# Altium PCB ESP32-AXIS3-6.0.PcbDoc (part 2 of 2)
Units mm, origin at the board's own origin, x right, y up, seen from the top; angles counter-clockwise.
Board outline 90.12 x 69.99 mm, 2 copper layers (TopLayer, BottomLayer); 125 components, 102 nets, 464 pads, 321 vias.
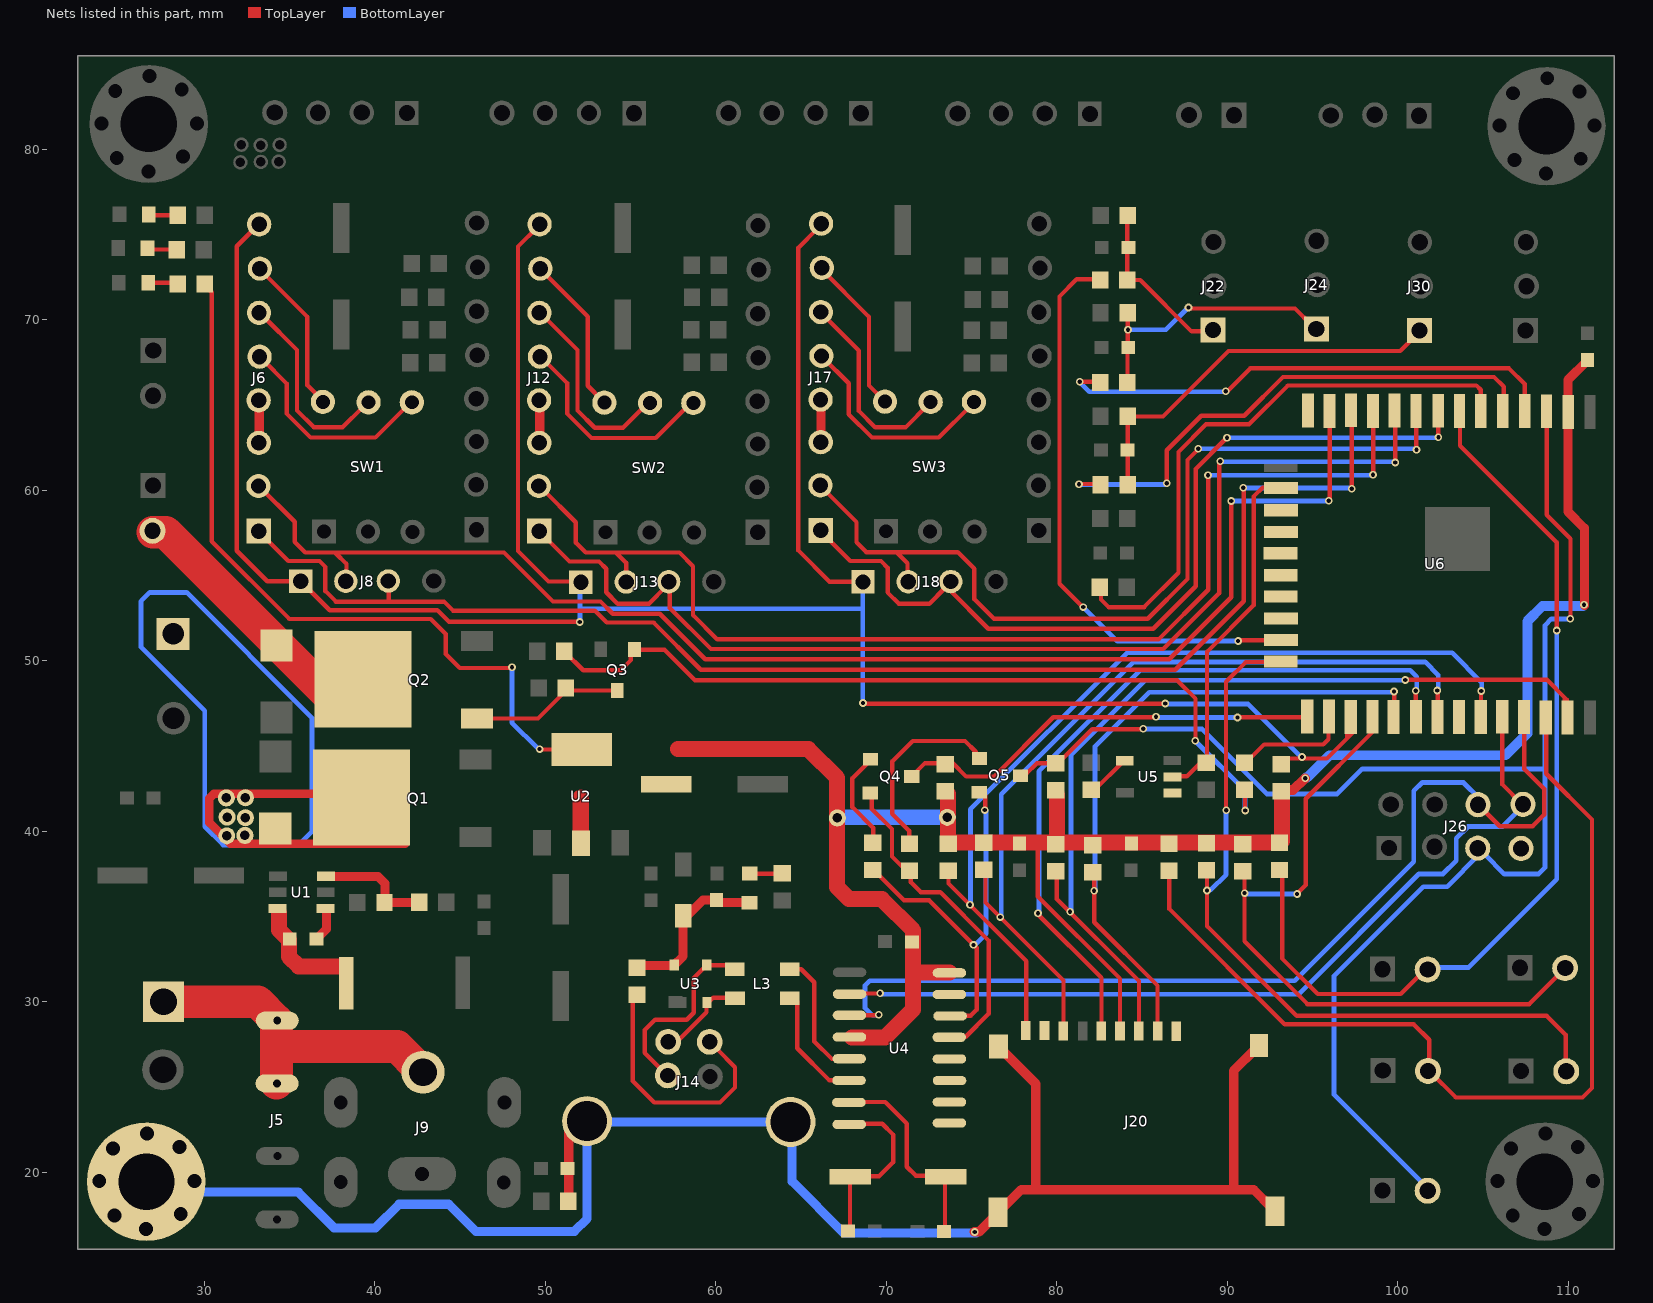
[diagram p2: the nets of this part, all layers, seen from the top]

## Via types
v1: diameter 0.45, hole 0.25, TopLayer to BottomLayer, tented both sides, 321 vias

## Nets (pads, with @x,y where several pads share a name; then routed paths per layer and width w, separated by ;. In a path a pad name is that pad's centre, name@x,y a point inside that pad or via, vN(x,y) a via of type N, cw(c..) or ccw(c..) an arc to the next point about the centre after c; other vN are vias at no path point) (continued)
UnNamedNet18: C19.1 J30.1 R33.2 R34.2 | length 22.4
  TopLayer w0.254: R33.2@84.153,60.568 R34.2@84.153,64.453 ; R34.2@84.386,64.331 86.222,64.331 90.064,68.173 100.145,68.173 J30.1@101.002,69.03
UnNamedNet19: C20.1 J24.1 R35.2 R36.2 | length 15.2
  TopLayer w0.254: R35.2@84.143,66.543 84.143,68.225 84.153,68.236 R36.2@84.153,70.067 ; v1@87.831,70.665 93.964,70.665 94.948,69.681 J24.1@95.075,69.681
  BottomLayer w0.279: v1@84.212,69.427 86.397,69.427 v1@87.662,70.691
  other v1: 84.175,69.421 87.72,70.723
UnNamedNet20: C21.1 J22.1 R37.2 R38.2 | length 9.2
  TopLayer w0.254: R38.2@84.138,75.957 84.138,72.464 84.264,72.337 84.894,72.337 87.905,69.326 J22.1@88.572,69.326
UnNamedNet21: C10.1 C15.2 C16.1 C17.1 C22.2 J20.6 pad.52 pad.53 R1.2 R20.1 R21.2 R22.2 R27.2 R28.1 R29.2 R39.2 R41.2 R42.2 R44.2 R45.1 U2.2 U2.4 U4.4 U4.16 U6.2 | length 166.3
  TopLayer w0.254: R1.2@29.877,72.057 29.993,72.057 30.427,71.623 30.427,57.018 34.989,52.456 43.275,52.456 44.154,51.578 44.154,50.403 44.974,49.583 v1@48.011,49.583 ; v1@49.641,44.805 U2.4@50.895,44.805 ; 78.883,39.301 78.883,36.184 83.704,31.364 J20.6@83.704,28.707
  TopLayer w0.533: v1@110.94,53.25 110.94,57.79 109.977,58.753 109.977,66.479 C22.2@111.067,67.569
  TopLayer w0.559: C22.2@111.067,67.569 C22.2@111.088,67.569
  TopLayer w0.584: R45.1@93.393,42.423 93.858,42.423 v1@94.546,43.111
  TopLayer w0.94: U2.2@52.075,39.333 52.075,41.979 ; 57.769,44.826 65.421,44.826 67.114,43.132 67.114,36.729 67.813,36.031 69.739,36.031 71.57,34.2 71.57,29.559 69.929,27.919 U4.4@67.998,27.919 ; 71.75,31.718 U4.16@73.692,31.718 ; R20.1@73.623,42.18 73.623,39.396 73.676,39.344 93.096,39.344 93.202,39.449 R45.1@93.202,42.148 ; R27.2@80.005,39.619 R28.1@80.005,42.127
  BottomLayer w0.279: v1@48.038,49.578 48.038,46.376 v1@49.551,44.863
  BottomLayer w0.584: v1@94.626,43.154 94.684,43.154 95.996,44.466 106.31,44.466 107.59,45.746 107.59,52.324 108.49,53.224 v1@110.86,53.224
  BottomLayer w0.914: pad.53@67.12,40.831 pad.52@73.575,40.831
  other v1: 94.567,43.111 49.662,44.826 48.043,49.62 110.919,53.292
UnNamedNet22: J26.5 J27.2 Q5.3 R28.2 U6.3 | length 92.7
  TopLayer w0.254: Q5.3@77.925,43.36 78.195,43.36 78.835,44 80.073,44 82.068,45.995 v1@85.021,45.995 ; U6.3@108.728,64.034 108.728,58.563 110.125,57.166 v1@110.125,52.472
  BottomLayer w0.279: v1@85.042,46 88.514,46 92.318,42.196 96.441,42.196 97.906,43.662 108.556,43.662 ; J27.2@101.716,18.775 101.716,19.103 96.261,24.559 96.261,31.528 101.489,36.756 102.891,36.756 104.786,38.65 105.098,38.65 106.251,37.497 108.246,37.497 108.633,37.883 108.633,52.086 109.008,52.462 v1@110.024,52.462
  other v1: 85.064,46.022 110.104,52.477
UnNamedNet23: R35.1 U6.4 | length 29.7
  TopLayer w0.254: v1@81.423,66.368 R35.1@82.555,66.368 ; v1@89.89,65.812 90.001,65.812 91.345,67.157 106.521,67.157 107.437,66.241 U6.4@107.437,65.066
  BottomLayer w0.279: v1@81.291,66.41 81.291,66.405 81.91,65.786 v1@89.948,65.786
  other v1: 89.911,65.812 81.349,66.373
UnNamedNet24: R33.1 U6.5 | length 30.5
  TopLayer w0.254: v1@81.291,60.378 R33.1@82.354,60.378 ; v1@86.445,60.505 86.445,62.352 88.466,64.373 90.985,64.373 93.266,66.654 105.643,66.654 106.209,66.088 U6.5@106.209,65.294
  BottomLayer w0.279: v1@81.317,60.346 v1@86.365,60.346
  other v1: 81.296,60.362 86.45,60.415
UnNamedNet25: R31.1 U6.6 | length 33.6
  TopLayer w0.254: R31.1@82.587,54.255 82.587,53.605 83.037,53.155 85.116,53.155 87.133,55.171 87.133,62.256 88.752,63.876 91.271,63.876 93.551,66.156 104.606,66.156 104.865,65.897 U6.6@104.865,65.098
UnNamedNet26: J29.2 R44.1 U6.7 | length 52.9
  TopLayer w0.254: R44.1@93.213,37.523 93.213,32.549 95.298,30.464 100.166,30.464 J29.2@101.425,31.724 ; U6.7@103.648,63.907 103.648,62.622 109.321,56.949 v1@109.321,51.827
  BottomLayer w0.279: J29.2@102.039,32.02 104.145,32.02 109.315,37.19 v1@109.315,51.705
  other v1: 109.321,51.779
UnNamedNet27: J17.1 J18.3 U6.8 | length 49
  TopLayer w0.254: J17.1@66.421,57.314 66.426,57.314 67.882,55.859 69.681,55.859 70.072,55.467 70.072,54.017 70.734,53.356 72.522,53.356 73.395,54.229 73.639,54.229 75.978,51.89 85.651,51.89 88.143,54.382 88.143,61.256 v1@89.911,63.024 ; v1@102.362,63.14 U6.8@102.362,63.807
  BottomLayer w0.279: v1@89.99,63.093 v1@102.357,63.093
  other v1: 89.974,63.082 102.378,63.114
UnNamedNet28: J17.2 J18.2 U6.9 | length 51.6
  TopLayer w0.254: J17.2@66.188,60.198 68.247,58.14 68.247,56.959 68.829,56.377 74.194,56.377 75.163,55.409 75.163,53.615 76.311,52.467 85.328,52.467 87.662,54.8 87.662,61.78 88.249,62.368 v1@88.249,62.405 ; 70.601,56.372 71.242,55.732 J18.2@71.242,54.658 ; v1@101.087,62.415 U6.9@101.087,64.024
  BottomLayer w0.279: v1@88.302,62.442 v1@101.097,62.442
  other v1: 101.097,62.383 88.291,62.447
UnNamedNet29: J12.1 J13.3 U6.10 | length 66.5
  TopLayer w0.254: J12.1@49.948,57.182 50.064,57.182 51.419,55.827 53.144,55.827 53.568,55.404 53.568,54.028 54.24,53.356 56.081,53.356 57.113,54.388 57.229,54.388 57.298,54.319 57.298,53.107 59.711,50.694 86.244,50.694 89.524,53.975 v1@89.524,61.669 ; v1@99.843,61.616 U6.10@99.843,64.172
  BottomLayer w0.279: v1@89.572,61.685 v1@99.848,61.685
  other v1: 99.848,61.632 89.583,61.717
UnNamedNet30: J12.2 J13.2 U6.11 | length 67.4
  TopLayer w0.254: J12.2@49.832,60.087 51.784,58.134 51.784,56.938 52.366,56.356 57.859,56.356 58.663,55.552 58.663,52.684 60.087,51.26 85.968,51.26 88.879,54.171 v1@88.879,60.875 ; 54.192,56.303 54.737,55.758 J13.2@54.737,54.769 ; v1@98.552,60.96 U6.11@98.552,64.04
  BottomLayer w0.279: v1@88.942,60.886 v1@98.473,60.886
  other v1: 88.863,60.881 98.547,60.923
UnNamedNet31: J6.1 J8.3 U6.12 | length 81.2
  TopLayer w0.254: J6.1@33.311,57.457 33.322,57.457 34.92,55.859 36.751,55.859 37.1,55.51 37.1,54.091 37.714,53.478 44.058,53.478 44.588,52.948 52.901,52.948 53.599,52.25 56.351,52.25 59.118,49.482 86.942,49.482 90.958,53.499 v1@90.958,60.14 ; 40.809,53.525 J8.3@40.809,54.372 ; v1@97.293,60.124 U6.12@97.293,64.135
  BottomLayer w0.279: v1@90.974,60.14 v1@97.256,60.14
  other v1: 97.298,60.097 90.937,60.15
UnNamedNet32: J6.2 J8.2 U6.13 | length 81.2
  TopLayer w0.254: J6.2@33.205,60.246 35.295,58.155 35.295,56.981 35.92,56.356 47.577,56.356 50.451,53.483 53.234,53.483 53.954,52.763 56.711,52.763 59.383,50.091 86.593,50.091 90.233,53.732 v1@90.233,59.383 ; 37.708,56.314 38.333,55.689 J8.2@38.333,54.906 ; v1@95.996,59.399 U6.13@95.996,64.098
  BottomLayer w0.279: v1@90.186,59.383 v1@95.906,59.383
  other v1: 90.228,59.378 95.954,59.388
UnNamedNet33: U6.14
UnNamedNet34: R40.2 U5.2 U6.16 | length 20
  TopLayer w0.254: U5.2@86.842,43.228 87.619,43.228 88.81,44.418 88.81,50.53 91.541,53.261 91.541,59.637 92.075,60.172 U6.16@92.488,60.172
UnNamedNet35: U6.17
UnNamedNet36: U6.18
UnNamedNet37: U6.19
UnNamedNet38: U6.20
UnNamedNet39: U6.21
UnNamedNet40: U6.22
UnNamedNet41: R37.1 U6.23 | length 33.5
  TopLayer w0.254: v1@81.571,53.107 80.153,54.525 80.153,71.374 81.169,72.39 R37.1@82.476,72.39 ; v1@90.63,51.202 U6.23@92.694,51.202
  BottomLayer w0.279: v1@81.64,53.197 81.64,53.07 83.55,51.16 v1@90.567,51.16
  other v1: 90.63,51.165 81.55,53.155
UnNamedNet42: J32.2 R41.1 U6.24 | length 44
  TopLayer w0.254: R41.1@88.81,37.523 88.81,34.443 94.075,29.178 108.733,29.178 109.839,28.072 J32.2@109.839,26.517 ; v1@89.921,41.259 89.921,48.773 91.085,49.937 U6.24@92.451,49.937
  BottomLayer w0.279: v1@88.874,36.55 89.001,36.55 89.921,37.47 v1@89.921,41.196
  other v1: 88.81,36.528 89.937,41.243
UnNamedNet43: Q4.3 R20.2 U6.25 | length 25.1
  TopLayer w0.254: Q4.3@71.533,43.275 72.263,44.005 73.893,44.005 74.676,43.222 76.322,43.222 79.793,46.694 v1@85.788,46.694 ; v1@90.593,46.688 U6.25@94.536,46.688
  BottomLayer w0.279: v1@85.783,46.683 v1@90.593,46.683
  other v1: 90.599,46.678 85.815,46.72
UnNamedNet44: R43.2 U6.26 | length 5.7
  TopLayer w0.254: R43.2@91.228,44.18 91.239,44.18 92.154,45.096 95.62,45.096 95.933,45.408 U6.26@95.933,45.863
UnNamedNet45: J6.8 J8.1 J12.8 J13.1 J17.8 J18.1 R45.2 U6.27 | length 146.5
  TopLayer w0.254: J6.8@33.02,75.438 31.898,74.316 31.898,56.462 33.692,54.668 35.655,54.668 37.354,52.97 43.667,52.97 44.344,52.292 v1@52.038,52.292 ; J12.8@49.562,75.517 49.562,75.464 48.398,74.3 48.398,56.441 50.181,54.658 J13.1@51.652,54.658 ; J17.8@65.987,75.385 64.839,74.237 64.839,56.478 66.67,54.647 J18.1@68.485,54.647 ; v1@68.649,47.493 v1@86.355,47.493 ; R45.2@93.276,44.048 93.276,44.074 93.477,44.275 95.837,44.275 U6.27@97.361,45.799 ; 97.023,45.556 U6.27@97.023,45.916
  BottomLayer w0.279: v1@52.028,52.335 J13.1@52.028,54.605 ; 52.083,53.057 68.572,53.057 ; v1@68.617,47.577 J18.1@68.617,54.509 ; v1@86.365,47.466 91.218,47.466 v1@94.345,44.339
  other v1: 94.377,44.36 86.355,47.503 68.628,47.535 52.022,52.276
UnNamedNet46: J33.2 R42.1 U6.28 | length 39.4
  TopLayer w0.254: R42.1@91.006,37.497 91.006,33.56 94.694,29.871 107.707,29.871 J33.2@109.453,31.618 ; v1@94.102,36.359 94.594,36.851 94.594,41.91 98.547,45.863 U6.28@98.547,46.212
  BottomLayer w0.279: v1@91.038,36.333 v1@94.096,36.333
  other v1: 94.091,36.327 91.011,36.38
UnNamedNet47: J20.8 R29.1 U6.29 | length 38.5
  TopLayer w0.254: R29.1@82.19,37.264 82.19,34.666 85.9,30.956 J20.8@85.9,28.691 ; U6.29@99.78,47.154 v1@99.78,48.218
  BottomLayer w0.279: v1@82.238,36.502 82.238,44.984 85.418,48.165 v1@99.774,48.165
  other v1: 82.185,36.518 99.774,48.202
UnNamedNet48: J20.5 U6.30 | length 43.4
  TopLayer w0.254: v1@78.909,35.184 78.909,35.115 82.614,31.411 J20.5@82.614,28.538 ; U6.30@101.05,47.085 v1@101.05,48.239
  BottomLayer w0.279: v1@78.952,35.137 78.952,43.524 84.884,49.456 100.722,49.456 101.108,49.07 v1@101.108,48.202
  other v1: 78.893,35.205 101.055,48.255
UnNamedNet49: J20.3 R21.1 U6.31 | length 49.5
  TopLayer w0.254: R21.1@75.814,37.629 75.814,35.83 80.391,31.253 J20.3@80.391,28.713 ; U6.31@102.346,46.826 v1@102.346,48.297
  BottomLayer w0.279: v1@76.74,34.967 76.74,42.18 84.497,49.937 101.595,49.937 102.362,49.17 v1@102.362,48.297
  other v1: 76.682,34.973 102.314,48.265
UnNamedNet50: U6.32
UnNamedNet51: J20.1 R22.1 U6.33 | length 52.5
  TopLayer w0.254: R22.1@73.649,37.645 73.649,36.946 78.206,32.39 J20.1@78.206,28.474 ; U6.33@104.881,47.249 v1@104.881,48.218
  BottomLayer w0.279: v1@74.93,35.793 74.93,41.286 84.116,50.472 103.182,50.472 104.923,48.731 v1@104.923,48.281
  other v1: 74.904,35.703 104.886,48.234
UnNamedNet52: J26.8 U4.2 U6.34 | length 49
  TopLayer w0.254: U4.2@68.522,30.491 v1@69.601,30.491 ; U6.34@106.13,45.953 106.13,42.746 107.267,41.608 J26.8@107.336,41.608
  BottomLayer w0.279: v1@69.649,30.443 94.181,30.443 101.24,37.502 102.648,37.502 103.426,38.28 103.426,39.587 104.119,40.28 106.13,40.28 107.262,41.413 J26.8@107.262,41.524
  other v1: 69.633,30.506
UnNamedNet53: J26.6 U4.3 U6.35 | length 57.6
  TopLayer w0.254: U4.3@68.204,29.215 v1@69.517,29.215 ; J26.6@104.807,41.476 105.981,40.301 107.902,40.301 108.585,40.984 108.585,42.487 107.416,43.656 U6.35@107.416,46.038
  BottomLayer w0.279: v1@69.585,29.21 69.167,29.21 68.755,29.623 68.755,30.972 69.019,31.237 93.954,31.237 100.939,38.222 100.939,42.37 101.436,42.868 103.844,42.868 J26.6@104.801,41.91
  other v1: 69.548,29.247
UnNamedNet54: J28.2 R39.1 U6.36 | length 54.7
  TopLayer w0.254: R39.1@86.598,37.47 86.598,35.444 93.361,28.681 100.933,28.681 101.838,27.776 J28.2@101.838,26.114 ; J28.2@101.743,25.892 101.902,25.892 103.404,24.389 110.829,24.389 111.39,24.95 111.39,40.698 108.701,43.386 U6.36@108.701,45.937
UnNamedNet55: J20.7 R27.1 U6.37 | length 52.2
  TopLayer w0.254: R27.1@79.999,37.497 79.999,36.036 84.815,31.221 J20.7@84.815,28.612 ; v1@100.468,48.89 108.744,48.89 109.897,47.736 U6.37@109.897,47.307 ; U6.37@109.781,47.395 109.781,47.776
  BottomLayer w0.279: v1@80.83,35.343 80.83,44.492 85.196,48.858 v1@100.431,48.858
  other v1: 80.777,35.28 100.431,48.879
UnNamedNet56: J26.7
UnNamedNet57: J20.2
UnNamedNet58: J20.9
UnNamedNet59: C7.1 J14.5 J14.6 J20.10 J20.11 J20.12 J20.13 pad.31 pad.32 pad.33 pad.34 pad.35 pad.36 pad.37 pad.38 pad.39 R10.2 | length 98.9
  TopLayer w0.559: R10.2@51.366,18.452 J14.5@51.366,22.707 ; v1@75.168,16.515 75.433,16.515 77.899,18.981 91.551,18.981 92.588,17.944 J20.13@92.731,17.944 ; J20.10@76.809,27.152 78.756,25.204 78.756,19.156 ; 90.376,19.055 90.376,25.966 J20.11@91.678,27.268
  TopLayer w0.584: J20.11@91.678,27.268 J20.11@91.71,27.268
  BottomLayer w0.533: pad.39@29.072,18.838 35.507,18.838 37.603,16.743 40.037,16.743 41.423,18.129 44.334,18.129 45.921,16.542 51.7,16.542 52.451,17.293 52.451,22.267 53.139,22.955 63.574,22.955 64.474,22.056 64.474,19.473 67.511,16.436 v1@75.258,16.436
  other v1: 75.189,16.505
UnNamedNet60: J17.5 SW3.4 | length 12.5
  TopLayer w0.254: J17.5@66.252,67.802 66.273,67.802 67.797,66.278 67.797,64.458 69.157,63.098 73.078,63.098 SW3.4@74.93,64.95
UnNamedNet61: J17.6 SW3.5 | length 11.3
  TopLayer w0.254: J17.6@66.405,70.067 66.516,70.067 68.389,68.194 68.389,64.659 69.353,63.696 71.125,63.696 SW3.5@72.48,65.05
UnNamedNet62: J17.7 SW3.6 | length 9.1
  TopLayer w0.254: J17.7@66.172,72.977 66.183,72.977 68.982,70.178 68.982,66.156 SW3.6@69.765,65.373
UnNamedNet63: J12.5 SW2.4 | length 12.8
  TopLayer w0.254: J12.5@49.652,67.712 49.863,67.712 51.276,66.299 51.276,64.505 52.705,63.077 56.478,63.077 SW2.4@58.584,65.183
UnNamedNet64: J12.6 SW2.5 | length 11.8
  TopLayer w0.254: J12.6@49.683,70.437 51.885,68.236 51.885,64.685 52.895,63.675 54.552,63.675 55.896,65.019 SW2.5@56.039,65.019
UnNamedNet65: J12.7 SW2.6 | length 9.5
  TopLayer w0.254: J12.7@49.678,72.999 52.483,70.194 52.483,66.135 53.356,65.262 SW2.6@53.356,64.982
UnNamedNet66: J17.3 J17.4 | length 2.2
  TopLayer w0.533: J17.3@66.172,62.891 J17.4@66.172,65.103
UnNamedNet67: J12.3 J12.4 | length 2.1
  TopLayer w0.559: J12.3@49.662,62.934 J12.4@49.662,65.082
UnNamedNet68: J6.3 J6.4 | length 2.3
  TopLayer w0.559: J6.3@33.216,62.839 J6.4@33.216,65.146
UnNamedNet69: J6.5 SW1.4 | length 12.5
  TopLayer w0.254: J6.5@33.3,67.686 33.412,67.686 34.824,66.273 34.824,64.505 36.232,63.098 40.031,63.098 SW1.4@42.005,65.072
UnNamedNet70: J6.6 SW1.5 | length 11.2
  TopLayer w0.254: J6.6@33.406,70.247 33.422,70.247 35.433,68.236 35.433,64.691 36.423,63.701 38.105,63.701 SW1.5@39.296,64.892
UnNamedNet71: J6.7 SW1.6 | length 8.8
  TopLayer w0.254: J6.7@33.322,72.776 33.443,72.776 36.042,70.178 36.042,66.172 SW1.6@36.756,65.458
UnNamedNet72: D5.1 J3.2 Q2.2 | length 14.4
  TopLayer w1.93: J3.2@26.972,57.547 27.734,57.547 Q2.2@37.354,47.927
UnNamedNet73: D3.1 R3.1 | length 1.2
  TopLayer w0.251: D3.1@27.077,76.131 R3.1@28.252,76.131
UnNamedNet74: D2.1 R2.1 | length 1.4
  TopLayer w0.251: D2.1@26.898,74.131 R2.1@28.332,74.131
UnNamedNet75: D1.1 R1.1 | length 1.5
  TopLayer w0.251: D1.1@26.882,72.173 R1.1@28.369,72.173
UnNamedNet76: D4.1 J2.1 pad.46 pad.47 pad.48 pad.49 pad.50 pad.51 Q1.2 | length 61.8
  TopLayer w0.508: Q1.2@36.835,42.212 30.559,42.212 30.295,41.947 30.295,40.518 31.533,39.28 Q1.2@41.788,39.28
  BottomLayer w0.279: 26.289,53.499 26.289,50.811 30.025,47.075 30.025,40.275 31.094,39.206 35.534,39.206 36.306,39.979 36.306,46.667 28.956,54.017 26.792,54.017 26.3,53.525
UnNamedNet77: Q2.1 Q3.3 R11.2 | length 8
  TopLayer w0.254: Q2.1@46.773,46.625 49.572,46.625 51.213,48.265 Q3.3@54.123,48.265
UnNamedNet78: Q3.1 R12.2 R43.1 | length 48
  TopLayer w0.254: R12.2@51.16,50.509 52.223,49.445 54.414,49.445 55.017,50.049 55.017,50.525 55.144,50.652 56.991,50.652 58.78,48.863 87.053,48.863 88.127,47.789 v1@88.127,45.392 ; v1@91.033,41.227 R43.1@91.033,42.18
  BottomLayer w0.279: v1@88.117,45.302 91.038,42.381 v1@91.038,41.212
  other v1: 91.048,41.222 88.112,45.323
UnNamedNet79: C3.1 U1.1 | length 1.9
  TopLayer w0.533: C3.1@36.624,33.708 36.624,33.729 37.158,34.264 U1.1@37.158,35.359
UnNamedNet80: R4.2 R5.1 U1.3 | length 6.3
  TopLayer w0.533: U1.3@37.274,37.364 40.18,37.364 40.603,36.941 40.603,35.883 40.661,35.825 R5.1@42.333,35.825
UnNamedNet81: C3.2 L1.1 U1.6 | length 6.1
  TopLayer w0.94: U1.6@34.385,35.211 34.385,34.211 34.957,33.639 34.957,32.65 35.523,32.083 L1.1@37.999,32.083
UnNamedNet82: J1.1 J5.1 J5.2 J9.1 | length 18.4
  TopLayer w1.93: J1.1@28.125,30.009 33.121,30.009 34.221,28.908 J5.2@34.221,25.247 ; 34.92,27.384 41.312,27.384 J9.1@42.582,26.114
UnNamedNet83: J14.1 L3.1 U3.2 | length 5
  TopLayer w0.254: J14.1@57.388,27.585 57.647,27.585 59.452,29.39 59.452,29.861 59.843,30.252 L3.1@61.013,30.252
UnNamedNet84: J14.2 L2.1 | length 14.4
  TopLayer w0.254: L2.1@55.123,30.11 55.123,25.358 56.383,24.098 60.24,24.098 61.124,24.982 61.124,26.173 J14.2@60.034,27.263
UnNamedNet85: J14.3 L3.4 U3.3 | length 10.9
  TopLayer w0.254: J14.3@57.124,25.834 57.002,25.834 55.827,27.009 55.827,28.347 56.436,28.956 58.298,28.956 58.7,29.358 58.7,31.401 59.441,32.142 L3.4@60.854,32.142
UnNamedNet86: C11.2 D6.1 D7.1 L2.2 U3.4 | length 8.9
  TopLayer w0.533: L2.2@55.785,32.136 57.531,32.136 58.081,32.687 58.081,34.814 59.24,35.973 59.97,35.973 60.113,35.83 D7.1@61.801,35.83
UnNamedNet87: D7.2 R17.2 | length 1.2
  TopLayer w0.254: D7.2@62.293,37.507 R17.2@63.505,37.507
UnNamedNet88: L3.2 U4.6 | length 6
  TopLayer w0.254: L3.2@64.775,30.02 64.775,27.279 66.643,25.411 U4.6@67.252,25.411
UnNamedNet89: L3.3 U4.5 | length 6.9
  TopLayer w0.254: L3.3@64.59,31.909 65.013,31.909 65.775,31.147 65.775,27.681 66.807,26.649 U4.5@67.273,26.649
UnNamedNet90: Q4.1 R18.2 | length 5.8
  TopLayer w0.254: Q4.1@68.961,44.143 68.961,44.069 68.008,43.116 68.008,41.423 69.226,40.206 R18.2@69.226,39.28
UnNamedNet91: Q4.2 R19.1 U4.13 | length 18.7
  TopLayer w0.254: Q4.2@69.146,42.132 69.146,41.317 70.326,40.137 70.326,38.529 71.438,37.417 71.438,37.015 72.025,36.428 73.168,36.428 75.999,33.597 75.999,29.3 74.66,27.961 U4.13@74.2,27.961
UnNamedNet92: Q5.1 R19.2 | length 11.1
  TopLayer w0.254: R19.2@71.342,39.455 71.342,40.031 70.347,41.026 70.347,44.106 71.543,45.302 74.612,45.302 75.248,44.667 Q5.1@75.248,44.328
UnNamedNet93: Q5.2 R18.1 U4.14 | length 21.5
  TopLayer w0.254: R18.1@69.39,37.608 71.035,35.962 72.506,35.962 75.3,33.168 75.3,29.549 74.946,29.194 U4.14@74.459,29.194 ; v1@75.798,41.259 Q5.2@75.798,42.122
  BottomLayer w0.279: v1@75.062,33.39 75.232,33.39 75.845,34.004 v1@75.845,41.217
  other v1: 75.115,33.343 75.771,41.249
UnNamedNet94: U5.1
UnNamedNet95: R30.1 U5.4 | length 2.4
  TopLayer w0.254: R30.1@82.09,42.45 82.243,42.45 U5.4@83.841,44.048
UnNamedNet96: C14.1 U4.7 Y1.2 | length 11.4
  TopLayer w0.254: U4.7@68.374,24.125 69.935,24.125 71.199,22.86 71.199,20.331 71.718,19.812 73.11,19.812 73.438,19.484 C14.1@73.438,16.584
UnNamedNet97: C12.2 U4.8 Y1.1 | length 10
  TopLayer w0.254: C12.2@67.866,16.515 67.866,19.59 68.051,19.775 69.57,19.775 70.395,20.6 70.395,22.214 69.76,22.849 U4.8@68.263,22.849
UnNamedNet98: U4.9
UnNamedNet99: U4.10
UnNamedNet100: U4.11
UnNamedNet101: U4.12
UnNamedNet102: U4.15

## Polygon pours and split planes (outlines as drawn)
UnNamedNet76 on TopLayer "TopLayer-UnNamedNet76" (hatched 90Degree grid 0.2 track 0.2, remove dead copper, pour order 0): 31.47,39.46 37.058,39.46 37.756,40.158 37.756,41.09 36.624,42.222 30.824,42.222 30.401,41.799 30.401,40.55
UnNamedNet13 on TopLayer "TopLayer-UnNamedNet13" (hatched 90Degree grid 0.1 track 0.1, remove dead copper, pour order 2): 35.28,15.722 105.892,15.722 cw(c108.749,19.553) 104.019,18.864 cw(c108.749,19.553) 104.918,22.41 cw(c108.749,19.553) 106.422,23.727 108.961,23.723 110.845,25.606 110.845,39.534 112.517,41.206 112.517,78.629 cw(c108.686,81.359) 109.464,76.72 cw(c108.686,81.359) 105.955,77.528 cw(c108.686,81.359) 104.046,80.581 cw(c108.686,81.359) 104.854,84.09 cw(c108.686,81.359) 105.884,85.139 29.649,85.148 cw(c26.813,81.402) 31.468,82.032 cw(c26.813,81.402) 30.55,78.556 cw(c26.813,81.402) 27.443,76.747 cw(c26.813,81.402) 23.967,77.665 cw(c26.813,81.402) 23.087,78.541 23.088,30.602 23.934,29.755 33.502,29.755 34.391,28.866 34.391,25.67 33.544,24.823 33.544,18.981 34.814,17.711 34.814,16.42
UnNamedNet14 on BottomLayer "BottomLayer-UnNamedNet14" (hatched 90Degree grid 0.2 track 0.2, remove dead copper, pour order 4): 27.157,64.622 24.913,64.622 23.59,65.945 23.59,72.009 32.03,80.449 34.253,80.449 34.597,80.105 34.597,79.248 34.327,78.978 32.713,78.978 25.008,71.268 25.008,66.606 25.384,66.23 27.215,66.23 27.681,65.765 27.681,65.098 27.241,64.659
UnNamedNet76 on BottomLayer "BottomLayer-UnNamedNet76" (hatched 90Degree grid 0.2 track 0.2, remove dead copper, pour order 6): 31.115,39.338 35.444,39.338 36.142,40.037 36.142,46.609 28.84,53.911 26.839,53.911 26.374,53.446 26.374,50.938 30.104,47.207 30.104,40.317 30.919,39.502
UnNamedNet13 on BottomLayer "BottomLayer-UnNamedNet13" (hatched 90Degree grid 0.1 track 0.1, remove dead copper, pour order 8): 31.411,19.674 35.264,19.664 37.507,17.42 66.971,17.42 68.474,15.917 105.474,15.917 cw(c108.611,19.457) 103.889,19.173 cw(c108.611,19.457) 105.071,22.595 cw(c108.611,19.457) 108.327,24.18 cw(c108.611,19.457) 111.749,22.998 cw(c108.611,19.457) 112.122,22.629 112.12,78.243 cw(c108.617,81.545) 108.759,76.73 cw(c108.617,81.545) 105.313,78.04 cw(c108.617,81.545) 103.802,81.402 cw(c108.617,81.545) 105.112,84.848 cw(c108.617,81.545) 105.131,84.868 29.76,84.868 cw(c25.104,80.687) 31.352,81.046 31.348,76.666 23.304,68.622 23.304,22.744 cw(c26.681,19.516) 26.576,24.185 cw(c26.681,19.516) 29.909,22.892 cw(c26.681,19.516) 31.345,19.768

## Keep-outs
KeepOutLayer:
  circle w0.1: c42.836,16.663 r0.911
  circle w0.1: c79.814,17.505 r0.551
  circle w0.1: c87.834,17.465 r0.551
  lines w0.1: 22.622,19.383 22.622,81.444 cw(c26.622,81.444) 26.622,85.445 108.569,85.445 cw(c108.569,81.37) 112.644,81.37 112.644,19.383 cw(c108.813,19.383) 108.813,15.552 29.162,15.552 ; 22.622,19.383 ccw(c26.453,19.383) 26.453,15.552 34.613,15.552
  text "T=1.6MM" at 24.76,10.917 h3.42

## Other copper
TopLayer:
  rectangle net UnNamedNet13: 56.483,29.66 58.06,31.284
  rectangle net UnNamedNet21: 50.329,41.069 59.674,45.757
  rectangle net UnNamedNet17: 55.753,37.539 58.166,38.523

## Silkscreen, mask and mechanical layers (free items; w line width, h text height)
TopOverlay:
  rectangle: 67.506,49.25 67.86,51.276
  rectangle: 75.983,49.25 76.555,51.297
  rectangle: 78.158,49.228 78.729,51.276
  lines w0.151: 71.162,51.297 71.94,51.297
  lines w0.176: 67.183,49.25 68.929,49.25 68.929,49.869 68.929,49.858 cw(c68.331,49.858) 68.331,49.26 67.887,49.26 67.887,51.239 67.463,51.239 67.463,49.302 ; 67.194,51.308 68.194,51.308 ; 68.776,49.329 68.802,49.334 68.882,49.556 68.85,49.466 68.707,49.318 68.792,49.292 68.855,49.461 ; 70.707,51.345 71.316,51.345 ; 73.66,51.319 74.496,51.319 ; 74.073,49.265 75.173,49.265 ; 74.194,51.202 73.988,51.207 74.073,51.075 74.523,50.26 74.523,49.419 74.687,49.419 74.687,50.393 74.3,51.287 73.808,51.287 74.396,50.191 74.396,49.324 74.787,49.324 74.787,50.244 75.369,51.271 ; 75.131,51.324 75.544,51.324 ; 75.814,49.265 77.629,49.265 77.629,49.874 ; 75.845,51.329 77.528,51.329 77.528,50.863 77.444,51.017 77.317,51.16 77.153,51.329 77.348,51.308 77.475,51.128 77.444,51.255 77.459,51.255 ; 76.449,50.292 76.999,50.292 ; 77.041,50.562 77.015,50.477 76.92,50.329 76.898,50.303 76.978,50.202 77.052,49.974 77.052,49.99 76.957,50.218 76.772,50.324 76.883,50.382 77.047,50.572 ; 77.063,49.874 77.063,50.736 ; 77.2,49.265 77.332,49.403 77.491,49.599 77.613,49.869 77.544,49.504 77.401,49.371 77.571,49.355 77.539,49.578 77.518,49.514 77.549,49.578 ; 77.989,49.244 79.804,49.244 79.804,49.853 ; 78.02,51.308 79.703,51.308 79.703,50.842 79.618,50.996 79.491,51.139 79.327,51.308 79.523,51.287 79.65,51.107 79.618,51.234 79.634,51.234 ; 78.624,50.271 79.174,50.271 ; 79.216,50.541 79.19,50.456 79.095,50.308 79.073,50.281 79.153,50.181 79.227,49.953 79.227,49.969 79.132,50.197 78.946,50.303 79.057,50.361 79.222,50.551 ; 79.237,49.853 79.237,50.715 ; 79.375,49.244 79.507,49.382 79.666,49.578 79.788,49.847 79.719,49.482 79.576,49.35 79.745,49.334 79.714,49.556 79.692,49.493 79.724,49.556
  lines w0.202: 69.183,51.308 70.125,51.308 ; 69.511,51.255 69.511,49.821 ccw(c70.083,49.821) 70.083,49.25 70.464,49.25 ccw(c70.464,49.81) 71.025,49.81 71.025,51.26 ; 69.755,51.239 69.755,49.736 69.787,49.493 69.638,49.593 69.638,51.207 69.845,51.207 69.845,49.609 ccw(c70.199,49.609) 70.199,49.255 ; 71.549,49.234 72.057,49.234 ; 71.787,49.244 71.787,51.271 72.242,51.271 73.088,49.974 ; 71.919,51.107 73.163,49.239 73.163,51.271 ; 71.993,51.165 73.083,49.493 73.088,49.795 72.808,50.149 ; 72.84,51.313 73.364,51.313
  lines w0.227: 72.152,51.16 72.104,51.229 72.808,50.149 ; 74.194,51.202 74.29,50.922 74.57,50.387 74.591,50.054 74.597,49.715 74.597,49.324 74.602,49.493 ; 74.628,50.207 74.65,49.895 74.65,49.482 ; 90.779,29.654 96.229,29.654 ; 93.424,28.12 93.424,31.094 ; 90.704,28.078 96.303,28.078 96.303,31.147 90.704,31.147 90.704,28.078
  text "X-MOTOR" at 35.682,84.645 h0.69
  text "-VIN+" at 98.377,84.519 h0.61
  text "Y1-MOTOR" at 48.911,84.497 h0.71
  text "Y2-MOTOR" at 62.098,84.455 h0.71
  text "+VIN-" at 87.286,84.455 h0.69
  text "Z-MOTOR" at 75.666,84.434 h0.71
  text "PWM" at 95.52,84.349 h0.71
  text "VIN" at 23.024,76.898 h0.58 r270
  text "5V" at 110.908,75.692 h0.64 r90
  text "5V" at 23.045,74.591 h0.56 r270
  text "3V3" at 23.045,73.025 h0.56 r270
  text "GND" at 110.908,72.517 h0.66 r90
  text "S" at 110.908,70.824 h0.66 r90
  text "-VIN+" at 23.49,68.135 h0.64 r270
  text "MO" at 35.047,66.654 h0.64
  text "M2" at 39.852,66.59 h0.69
  text "MO" at 51.514,66.59 h0.69
  text "M2" at 56.319,66.59 h0.69
  text "MO" at 68.067,66.527 h0.69
  text "M2" at 72.829,66.527 h0.69
  text "Z-Limt" at 93.001,66.103 h0.66
  text "Y-Limt" at 99.097,66.103 h0.66
  text "X-Limt" at 105.235,66.04 h0.66
  text "Probe" at 86.164,66.019 h0.66
  text "ON" at 37.439,63.436 h0.64
  text "ON" at 53.991,63.394 h0.61
  text "ON" at 70.543,63.352 h0.61
  text "+PUINP-" at 23.596,60.706 h0.64 r270
  text "EN" at 34.951,52.567 h0.64
  text "STP" at 37.417,52.578 h0.64
  text "DIR" at 40.053,52.578 h0.64
  text "X" at 45.429,52.589 h1.07
  text "EN" at 51.419,52.546 h0.64
  text "DIR" at 56.51,52.557 h0.64
  text "Y" at 61.854,52.546 h1.27
  text "GND" at 42.582,52.514 h0.69
  text "STP" at 53.853,52.536 h0.64
  text "GND" at 59.071,52.525 h0.66
  text "EN" at 67.897,52.536 h0.66
  text "STP" at 70.353,52.514 h0.66
  text "DIR" at 72.935,52.514 h0.66
  text "GND" at 75.666,52.493 h0.66
  text "Z" at 78.343,52.504 h1.14
  text "-SPINDLE+" at 23.469,51.901 h0.64 r270
  text "Switch" at 23.045,32.322 h0.64
  text "S" at 95.827,31.432 h0.61
  text "GND" at 92.874,31.369 h0.71
  text "Start" at 93.678,30.141 h0.53
  text "Hold" at 90.927,30.099 h0.69
  text "Pre" at 90.958,28.533 h0.61
  text "Run" at 93.848,28.406 h0.66
  text "Earth" at 28.337,22.945 h0.61
  text "Reset" at 99.065,15.822 h0.61
BottomOverlay:
  text "X-Motor" at 39.635,83.323 h0.66
  text "Y2-Motor" at 66.305,83.301 h0.64
  text "Z-Motor" at 79.809,83.301 h0.64
  text "Y1-Motor" at 52.821,83.238 h0.66
  text "1A" at 36.925,80.359 h0.66
  text "2B" at 55.742,80.338 h0.66
  text "1A" at 76.909,80.338 h0.66
  text "1A" at 50.197,80.317 h0.66
  text "2A" at 53.118,80.317 h0.66
  text "2A" at 63.616,80.317 h0.69
  text "1A" at 66.347,80.317 h0.69
  text "2A" at 79.724,80.317 h0.66
  text "2A" at 39.783,80.296 h0.66
  text "2B" at 61.119,80.296 h0.69
  text "1B" at 74.369,80.296 h0.69
  text "GND" at 99.134,80.296 h0.71
  text "2B" at 42.365,80.275 h0.66
  text "1B" at 47.657,80.275 h0.66
  text "2B" at 82.412,80.275 h0.66
  text "VIN" at 88.424,80.275 h0.64
  text "PWM" at 96.361,80.275 h0.71
  text "VIN" at 102.182,80.275 h0.66
  text "1B" at 68.929,80.232 h0.69
  text "GND" at 91.133,80.232 h0.71
  text "EN" at 35.549,75.3 h0.66
  text "VIN" at 61.33,75.258 h0.66
  text "VIN" at 77.883,75.258 h0.64
  text "VIN" at 44.969,75.237 h0.66
  text "EN" at 52.123,75.216 h0.74
  text "EN" at 68.591,75.195 h0.71
  text "5V" at 97.441,74.263 h0.61
  text "5V" at 91.239,74.242 h0.61
  text "5V" at 109.866,74.221 h0.61
  text "5V" at 103.685,74.2 h0.61
  text "GND" at 44.842,72.612 h0.71
  text "GND" at 61.373,72.612 h0.71
  text "GND" at 77.819,72.591 h0.71
  text "MO" at 35.655,72.57 h0.71
  text "MO" at 52.229,72.528 h0.76
  text "MO" at 68.654,72.506 h0.79
  text "GND" at 98.224,71.766 h0.71
  text "GND" at 110.649,71.681 h0.71
  text "GND" at 91.959,71.639 h0.71
  text "GND" at 104.426,71.639 h0.71
  text "2B" at 61.352,70.157 h0.69
  text "2B" at 77.819,70.136 h0.61
  text "2B" at 44.863,70.072 h0.71
  text "M1" at 35.359,70.009 h0.71
  text "M1" at 51.848,69.988 h0.76
  text "M1" at 68.4,69.966 h0.79
  text "Probe" at 92.932,69.141 h0.66
  text "Z-Limt" at 99.536,69.12 h0.69
  text "X-Limt" at 111.94,69.099 h0.69
  text "Y-Limt" at 105.759,69.035 h0.69
  text "GND" at 30.11,67.744 h0.71
  text "2A" at 61.309,67.532 h0.69
  text "M2" at 35.613,67.511 h0.74
  text "2A" at 44.926,67.511 h0.69
  text "M2" at 52.081,67.511 h0.71
  text "M2" at 68.464,67.49 h0.69
  text "2A" at 77.777,67.49 h0.61
  text "VIN" at 30.067,65.162 h0.66
  text "1A" at 44.736,65.14 h0.69
  text "1A" at 61.203,65.14 h0.71
  text "1A" at 77.713,65.162 h0.69
  text "RST" at 35.825,64.95 h0.66
  text "RST" at 68.845,64.908 h0.69
  text "RST" at 52.398,64.865 h0.71
  text "M2" at 42.534,63.489 h0.71
  text "M0" at 53.859,63.468 h0.71
  text "MO" at 37.497,63.447 h0.74
  text "M1" at 39.804,63.447 h0.71
  text "M1" at 56.42,63.447 h0.76
  text "M2" at 75.618,63.447 h0.76
  text "M2" at 59.066,63.426 h0.76
  text "M0" at 70.39,63.426 h0.76
  text "M1" at 72.93,63.426 h0.76
  text "1B" at 77.671,62.537 h0.69
  text "1B" at 44.715,62.495 h0.69
  text "1B" at 61.225,62.452 h0.71
  text "SLP" at 35.909,62.389 h0.66
  text "SLP" at 52.483,62.346 h0.71
  text "SLP" at 68.908,62.368 h0.69
  text "VIN" at 29.961,59.912 h0.66
  text "STP" at 36.079,59.785 h0.66
  text "STP" at 69.226,59.785 h0.71
  text "STP" at 52.673,59.764 h0.71
  text "VCC" at 61.309,59.743 h0.66
  text "VCC" at 44.926,59.679 h0.71
  text "VCC" at 77.883,59.658 h0.69
  text "DIR" at 68.866,57.309 h0.69
  text "DIR" at 35.867,57.266 h0.66
  text "DIR" at 52.44,57.266 h0.71
  text "GND" at 61.436,57.224 h0.69
  text "PUMP-" at 31.104,57.182 h0.69
  text "GND" at 45.096,57.182 h0.71
  text "GND" at 77.946,57.161 h0.69
  text "GND" at 44.376,52.716 h0.71
  text "GND" at 60.822,52.652 h0.69
  text "EN" at 69.099,52.652 h0.69
  text "EN" at 52.673,52.631 h0.71
  text "GND" at 77.205,52.631 h0.69
  text "EN" at 36.142,52.61 h0.66
  text "STP" at 39,52.61 h0.71
  text "STP" at 55.488,52.61 h0.71
  text "STP" at 71.893,52.61 h0.69
  text "DIR" at 41.518,52.589 h0.71
  text "DIR" at 57.986,52.589 h0.71
  text "DIR" at 74.475,52.567 h0.69
  text "SPINDLE-" at 34.364,51.065 h0.69
  text "VIN" at 31.401,46.133 h0.66
  text "Stret" at 110.987,30.025 h0.53
  text "Hold" at 102.944,29.877 h0.69
  text "GND" at 107.77,29.813 h0.69
  text "GND" at 99.917,29.792 h0.69
  text "Pre" at 102.584,23.802 h0.64
  text "GND" at 99.917,23.717 h0.71
  text "Run" at 110.776,23.717 h0.71
  text "GND" at 108.066,23.696 h0.71
  text "ESP32-Axis3-6.0" at 95.515,19.272 h0.81
  text "V1.0" at 83.492,19.251 h0.84
  text "Reset" at 103.325,16.732 h0.61
  text "GND" at 99.875,16.711 h0.71

## Text inside footprints (layer, text, board x,y; h text height)
SW1: TopOverlay "3" at 41.693,58.854 h0.61; TopOverlay "2" at 39.195,58.812 h0.61; TopOverlay "1" at 36.666,58.801 h0.61
SW2: TopOverlay "3" at 58.203,58.812 h0.61; TopOverlay "2" at 55.705,58.769 h0.61; TopOverlay "1" at 53.176,58.759 h0.61
SW3: TopOverlay "3" at 74.66,58.87 h0.61; TopOverlay "2" at 72.162,58.827 h0.61; TopOverlay "1" at 69.633,58.817 h0.61